# Altium PCB rotary-led-ring.PcbDoc
Units mil, origin at the board's own origin, x right, y up, seen from the top; angles counter-clockwise.
Board outline 1360.68 x 1360.68 mil, 2 copper layers (Top Layer, Bottom Layer); 9 components, 27 nets, 83 pads, 0 vias.
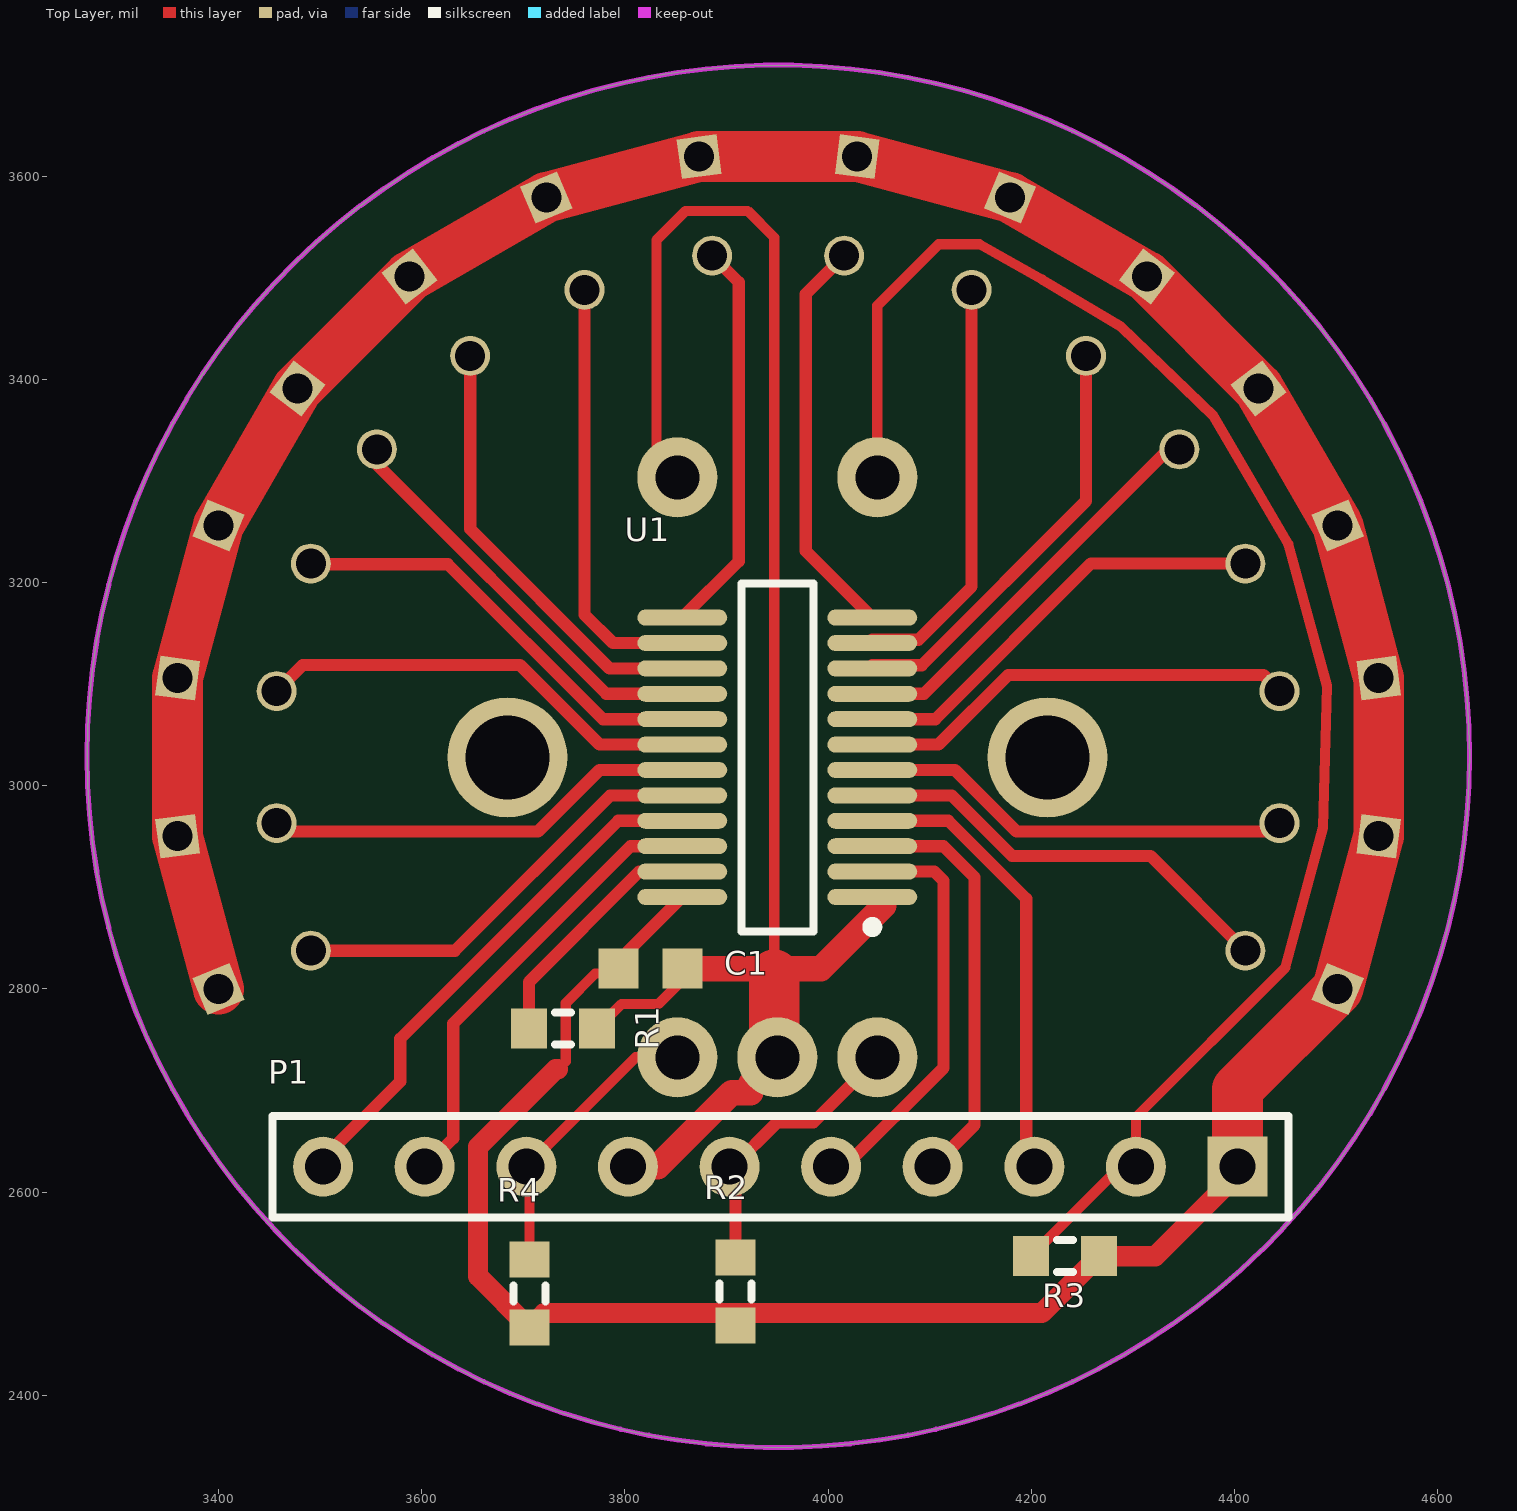
[diagram p0: Top Layer view]
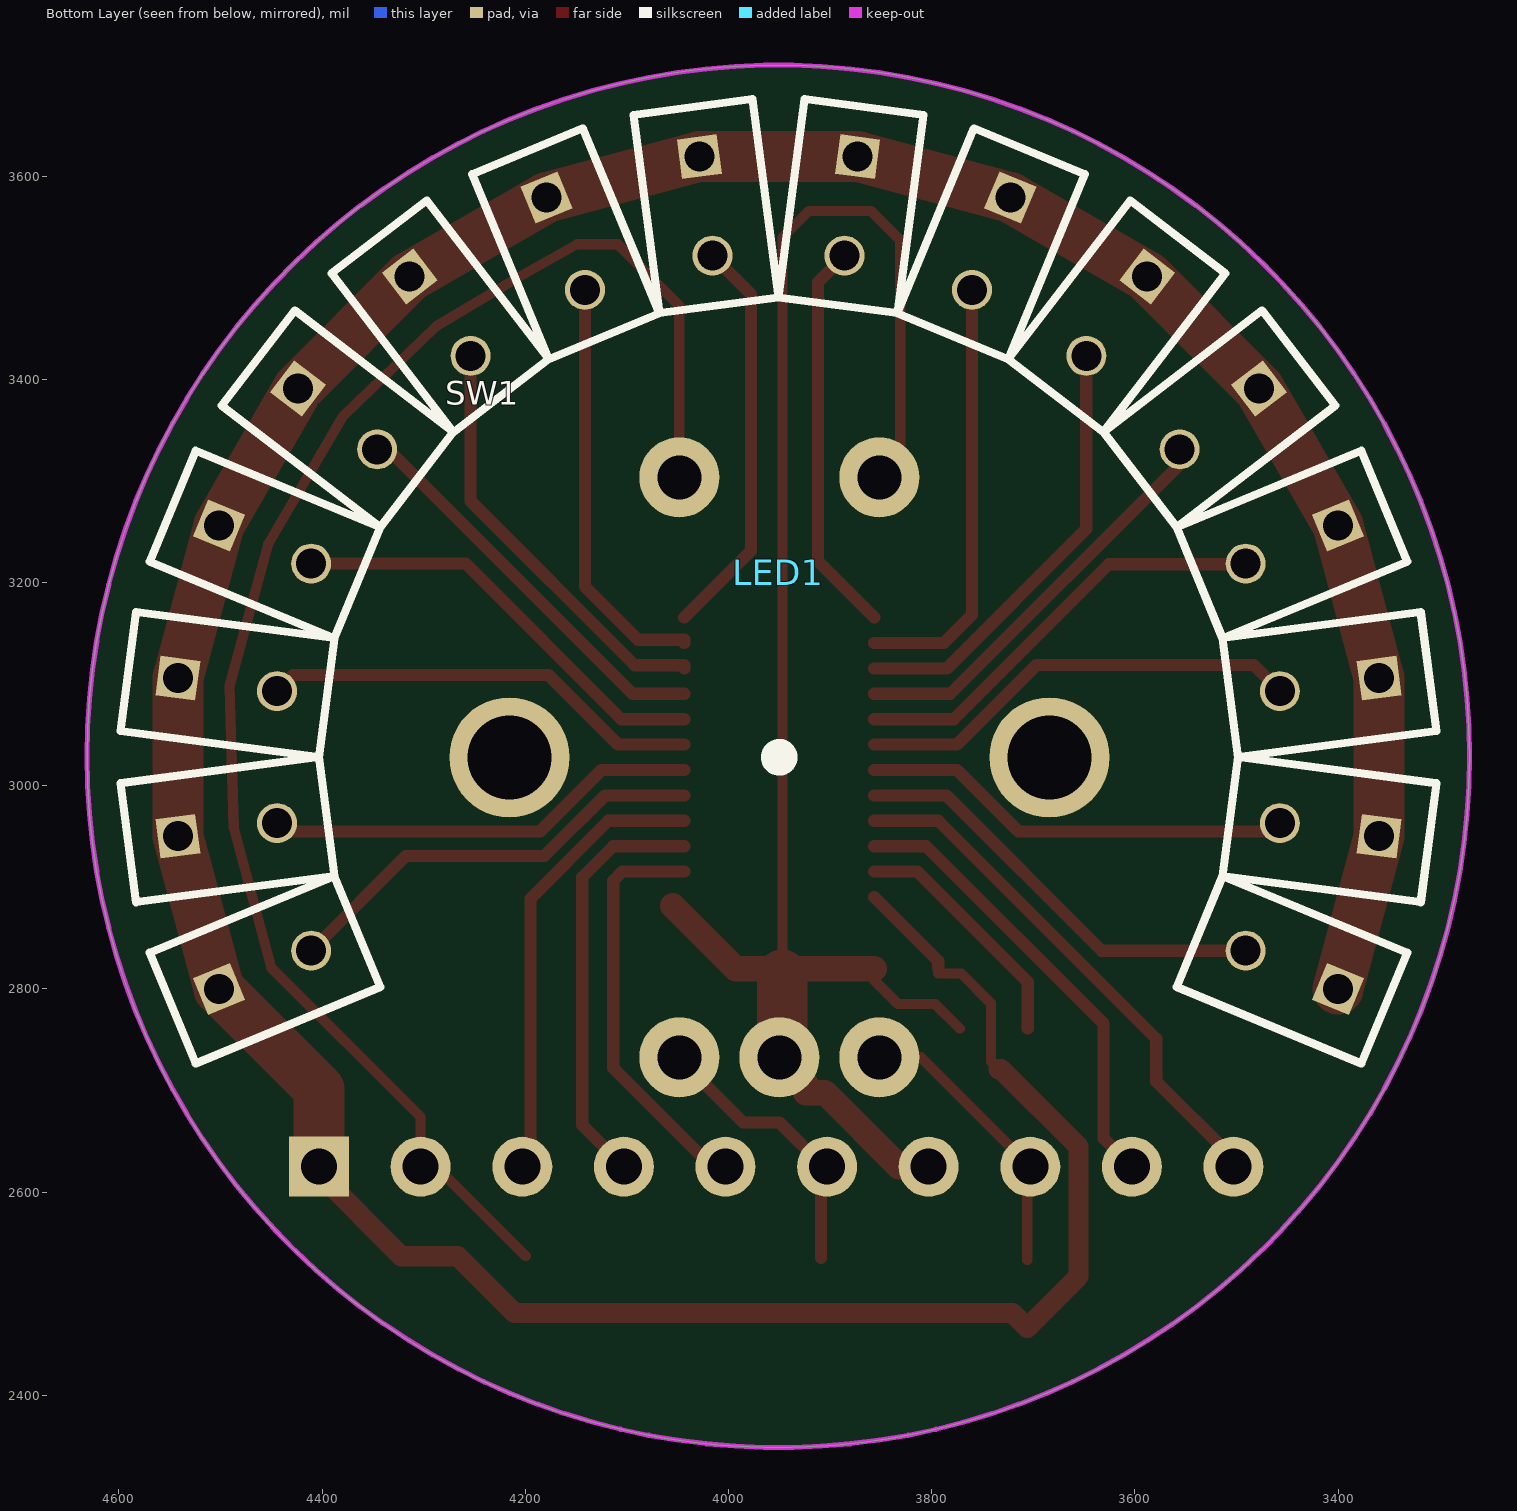
[diagram p1: Bottom Layer view, seen from below]

## Layer stack, top to bottom
Top Solder: solder mask 0.4, Solder Resist, Dk 3.5
Top Layer: signal copper 1.4
Dielectric 1: dielectric 12.6, FR-4, Dk 4.8
Bottom Layer: signal copper 1.4
Bottom Solder: solder mask 0.4, Solder Resist, Dk 3.5

## Board outline
3270.66,3029 ccw(c3951,3029) 3951,2348.66 ccw(c3951,3029) 4631.34,3029 ccw(c3951,3029) 3951,3709.34 ccw(c3951,3029)

## Design rules (kind name [scope] priority, off if disabled: settings)
Clearance [All] p1: gap=8 ignorepadtopadclearanceinfootprint=FALSE except(0: Arc-Hole Track-Hole SMDPad-Hole THPad-Hole Via-Hole Fill-Hole Poly-Hole Region-Hole Text-Hole)
PolygonConnect [All] p1: connectstyle=Relief reliefconductorwidth=10 reliefentries=4 polygonreliefangle="90 Angle" airgapwidth=10
RoutingVias [All] p1: holewidth=28 width=50 viastyle="Through Hole" minholewidth=28 minwidth=50 maxholewidth=28 maxwidth=50
SolderMaskExpansion [All] p1: expansion=4
Width [All] p1: maxlimit=200 minlimit=8 preferedwidth=10
30 further rules are at their usual default settings.

## Components (designator, comment, footprint, x,y, rotation, side; value= is the part's Value field where it differs from the comment)
C1 "100n" CAPC1608N 3825,2820 r180 top
LED1 "LED_RING16" LEDRING_16_GREEN 4501.64,2800 r180 bottom
P1 "Header 10" HDR1X10 4403,2625 r180 top
R1 "1k" RESC1608N 3739,2761 r0 top
R2 "1k" RESC1608N 3909,2502 r90 top
R3 "1k" RESC1608N 4233,2537 r180 top
R4 "1k" RESC1608N 3706,2500 r90 top
SW1 "EN12-HS22AF20" EN12-HS 3950,3028 r180 bottom
U1 "STP16CPC26PTR" SOP635P600-24N 3950,3028 r180 top

## Footprints (in the part's own frame and the unit in brackets; to place one, negate y for a bottom-side part, rotate by r counter-clockwise, add the part's x,y. Pads: shape width x height; smd on the part's side, far side on the other; paste and mask are expansions set on the pad)
CAPC1608N [mm] "Chip Capacitor (0603), Body 1.6x0.8mm, IPC Medium Density"
  rect 1x1 smd: 1(-0.8,0) 2(0.8,0)
  body extent -0.8,-0.41 0.8,0.41, height 0.91
EN12-HS [mm]
  round 2 hole 1.1: 1(-2.5,-7.5) 2(0,-7.5) 3(2.5,-7.5) 4(-2.5,7) 5(2.5,7)
  round 3 hole 2.1: MH1(-6.75,0) MH2(6.75,0)
  silkscreen extent -0.14,-0.14 0.14,0.14, body extent -7.51,-7.75 7.51,7.25, height 16.2
HDR1X10 [mm] "Connector; Header; 10 Position"
  rect 1.5x1.5 hole 0.9: 1(0,0)
  round 1.5 hole 0.9: 2(2.54,0) 3(5.08,0) 4(7.62,0) 5(10.16,0) 6(12.7,0) 7(15.24,0) 8(17.78,0) 9(20.32,0) 10(22.86,0)
  silkscreen extent -1.27,-1.27 24.13,1.27
LEDRING_16_GREEN [mm] "16 ring LED"
  rect 1x1 hole 0.75 rot 112.5: 1(0,0) 25(27.982,11.59)
  round 1 hole 0.75: 2(2.31,0.957) 4(1.455,4.145) 6(1.455,7.446) 8(2.31,10.634) 10(3.96,13.492) 12(6.294,15.826) 14(9.152,17.476) 16(12.341,18.331) 18(15.641,18.331) 20(18.829,17.476) 22(21.688,15.826) 24(24.022,13.492) 26(25.672,10.634) 28(26.526,7.446) 30(26.526,4.145) 32(25.672,0.957)
  rect 1x1 hole 0.75 rot 97.5: 3(-1.023,3.819) 27(29.005,7.772)
  rect 1x1 hole 0.75 rot 82.5: 5(-1.023,7.772) 29(29.005,3.819)
  rect 1x1 hole 0.75 rot 67.5: 7(0,11.59) 31(27.982,0)
  rect 1x1 hole 0.75 rot 52.5: 9(1.977,15.014)
  rect 1x1 hole 0.75 rot 37.5: 11(4.772,17.809)
  rect 1x1 hole 0.75 rot 22.5: 13(8.196,19.786)
  rect 1x1 hole 0.75 rot 7.5: 15(12.014,20.809)
  rect 1x1 hole 0.75 rot 172.5: 17(15.968,20.809)
  rect 1x1 hole 0.75 rot 157.5: 19(19.786,19.786)
  rect 1x1 hole 0.75 rot 142.5: 21(23.21,17.809)
  rect 1x1 hole 0.75 rot 127.5: 23(26.005,15.014)
  silkscreen extent -2.46,-1.86 30.44,22.24, body extent -2.43,-1.77 30.41,22.22, height 7.1
RESC1608N [mm] "Chip Resistor, Body 1.6x0.8mm, IPC Medium Density"
  rect 0.9x1 smd: 1(-0.85,0) 2(0.85,0)
  silkscreen extent -0.2,-0.4 0.2,0.4, body extent -0.8,-0.4 0.8,0.4, height 0.55
SOP635P600-24N [mm] "SOP, 24-Leads, Body 8.6x3.9mm, Pitch 0.635mm, IPC Medium Density"
  oval 2.25x0.4 smd: 1(-2.375,3.492) 2(-2.375,2.857) 3(-2.375,2.222) 4(-2.375,1.587) 5(-2.375,0.952) 6(-2.375,0.317) 7(-2.375,-0.318) 8(-2.375,-0.953) 9(-2.375,-1.588) 10(-2.375,-2.223) 11(-2.375,-2.858) 12(-2.375,-3.492) 13(2.375,-3.492) 14(2.375,-2.857) 15(2.375,-2.222) 16(2.375,-1.587) 17(2.375,-0.952) 18(2.375,-0.317) 19(2.375,0.318) 20(2.375,0.953) 21(2.375,1.588) 22(2.375,2.223) 23(2.375,2.858) 24(2.375,3.492)
  silkscreen extent -2.5,-4.35 0.9,4.37, body extent -1.99,-4.37 1.99,4.37, height 1.76

## Part data
C1: library part "Cap Semi", "Capacitor (Semiconductor SIM Model)"
P1: "Header, 10-Pin"
R1 R2 R3 R4: library part "Res Semi", "Semiconductor Resistor"
SW1: "ENCODER 12MM ROTARY SW TOP ADJ"
U1: "IC LED DRVR LIN DIM 90MA 24QSOP"

## Nets (pads, with @x,y where several pads share a name; then routed paths per layer and width w, separated by ;. In a path a pad name is that pad's centre, name@x,y a point inside that pad or via, vN(x,y) a via of type N, cw(c..) or ccw(c..) an arc to the next point about the centre after c; other vN are vias at no path point)
A: P1.6 R2.2 SW1.1 | length 282.8
  Top Layer w12: R2.2 3909,2619 P1.6 3906.2,2625 3949.73,2668.53 3985.53,2668.53 4048.43,2731.43 SW1.1
B: P1.8 R4.2 SW1.3 | length 286
  Top Layer w10: R4.2 3706,2622 P1.8 3810.72,2732.72 SW1.3
CLK: P1.4 U1.3 | length 415.1
  Top Layer w12: U1.3 4113.5,2940.5 4144,2910 4144,2666 P1.4
GND: C1.1 P1.7 R1.2 SW1.2 SW1.5 U1.1 | length 1725
  Top Layer w10: R1.2 3796.56,2785.09 3833,2785.09 3856.5,2808.59 C1.1 ; SW1.5 3831,3324.17 3831,3537 3859.84,3565.84 3920.84,3565.84 3947,3539.69 3947,2820 3947,2814
  Top Layer w25: P1.7 3832.25,2625 3905.15,2697.9 3923.94,2697.9 3923.94,2706.67 SW1.2 ; C1.1 3947,2820 3993,2820 4055,2882
  Top Layer w50: 3947,2814 3947,2735.72 SW1.2
LE: P1.3 U1.4 | length 450.4
  Top Layer w12: U1.4 4118.36,2965.5 4195,2888.86 4195,2633 P1.3
NetLED1_2: LED1.2 U1.5 | length 430.5
  Top Layer w12: U1.5 4121.65,2990.5 4181.15,2931 4317.38,2931 LED1.2
NetLED1_4: LED1.4 U1.6 | length 430.8
  Top Layer w12: U1.6 4124.93,3015.5 4185.49,2954.94 4432.47,2954.94 4442.53,2965 LED1.4
NetLED1_6: LED1.6 U1.7 | length 435.8
  Top Layer w12: U1.7 4108.78,3040.5 4177.28,3109 4428.48,3109 LED1.6
NetLED1_8: LED1.8 U1.8 | length 430.6
  Top Layer w12: U1.8 4105.5,3065.5 4258.65,3218.65 LED1.8
NetLED1_10: LED1.10 U1.9 | length 401.9
  Top Layer w12: U1.9 4094.5,3090.5 4335.19,3331.19 LED1.10
NetLED1_12: LED1.12 U1.10 | length 423.3
  Top Layer w12: U1.10 4043.5,3118.63 4092.27,3118.63 4253.85,3280.21 LED1.12
NetLED1_14: LED1.14 U1.11 | length 414.7
  Top Layer w12: U1.11 4043.5,3143.63 4088.98,3143.63 4141.31,3195.96 LED1.14
NetLED1_16: LED1.16 U1.12 | length 399
  Top Layer w12: LED1.16 3978,3483.88 3978,3231 U1.12
NetLED1_18: LED1.18 U1.13 | length 390
  Top Layer w12: U1.13 3912,3221 3912,3495.53 LED1.18
NetLED1_20: LED1.20 U1.14 | length 427.4
  Top Layer w12: LED1.20 3760.33,3168.37 3788.2,3140.5 U1.14
NetLED1_22: LED1.22 U1.15 | length 435.9
  Top Layer w12: LED1.22 3647.79,3252.63 3784.92,3115.5 U1.15
NetLED1_24: LED1.24 U1.16 | length 409
  Top Layer w12: LED1.24 3555.91,3316.23 3781.64,3090.5 U1.16
NetLED1_26: LED1.26 U1.17 | length 429.3
  Top Layer w12: LED1.26 3490.93,3218.07 3625.78,3218.07 3778.35,3065.5 U1.17
NetLED1_28: LED1.28 U1.18 | length 442.3
  Top Layer w12: LED1.28 3482.99,3118.82 3696.75,3118.82 3775.07,3040.5 U1.18
NetLED1_30: LED1.30 U1.19 | length 427.7
  Top Layer w12: LED1.30 3465.54,2954.94 3714.51,2954.94 3775.07,3015.5 U1.19
NetLED1_32: LED1.32 U1.20 | length 428.9
  Top Layer w12: LED1.32 3632.67,2837.67 3785.5,2990.5 U1.20
NetR1_1: R1.1 U1.23 | length 241.8
  Top Layer w12: R1.1 3705.54,2806.89 3814.14,2915.5 U1.23
OE: P1.10 U1.21 | length 523.8
  Top Layer w12: P1.10 3503,2633 3579,2709 3579,2751 3793.5,2965.5 U1.21
SDI: P1.5 U1.2 | length 408.7
  Top Layer w12: P1.5 4016.18,2625 4113.5,2722.32 4113.5,2906.5 4104.5,2915.5 U1.2
SDO: P1.9 U1.22 | length 450.4
  Top Layer w12: P1.9 3631,2653 3631,2766 3805.5,2940.5 U1.22
SWITCH: P1.2 R3.2 SW1.4 | length 1552
  Top Layer w10: SW1.4 4048.43,3472.43 4109,3533 4149,3533 4211,3498 4288,3452 4380,3363 4453,3238 4491,3098 4487,2959 4450,2821 4303,2674 P1.2 4287.54,2625 R3.2
VDD: C1.2 LED1.1 LED1.3 LED1.5 LED1.7 LED1.9 LED1.11 LED1.13 LED1.15 LED1.17 LED1.19 LED1.21 LED1.23 LED1.25 LED1.27 LED1.29 LED1.31 P1.1 R2.1 R3.1 R4.1 U1.24 | length 3859.9
  Top Layer w10: 3734,2721 3741.75,2728.75 3741.75,2786.07 3770.87,2815.19 3793.5,2815.19 C1.2
  Top Layer w12: C1.2 3793.5,2827.51 U1.24
  Top Layer w20: 3734,2721 3731.79,2721 3655.47,2644.69 3655.47,2517.06 R4.1 3720.46,2481 4210.46,2481 R3.1 4322,2537 4403,2618 P1.1
  Top Layer w50: LED1.31 LED1.29 LED1.27 LED1.25 LED1.23 LED1.21 LED1.19 LED1.17 LED1.15 LED1.13 LED1.11 LED1.9 LED1.7 LED1.5 LED1.3 LED1.1 4403,2701.36 P1.1
pads on no net: SW1.MH1 SW1.MH2

## Keep-outs
Keep-Out Layer:
  circle w5: c3951,3029 r680.34